# Altium PCB relay.PcbDoc
Units mil, origin at the board's own origin, x right, y up, seen from the top; angles counter-clockwise.
Board outline 2410 x 2235 mil, 2 copper layers (Top Layer, Bottom Layer); 40 components, 33 nets, 179 pads, 61 vias.
Unrouted connection lines stored in the file: 39.
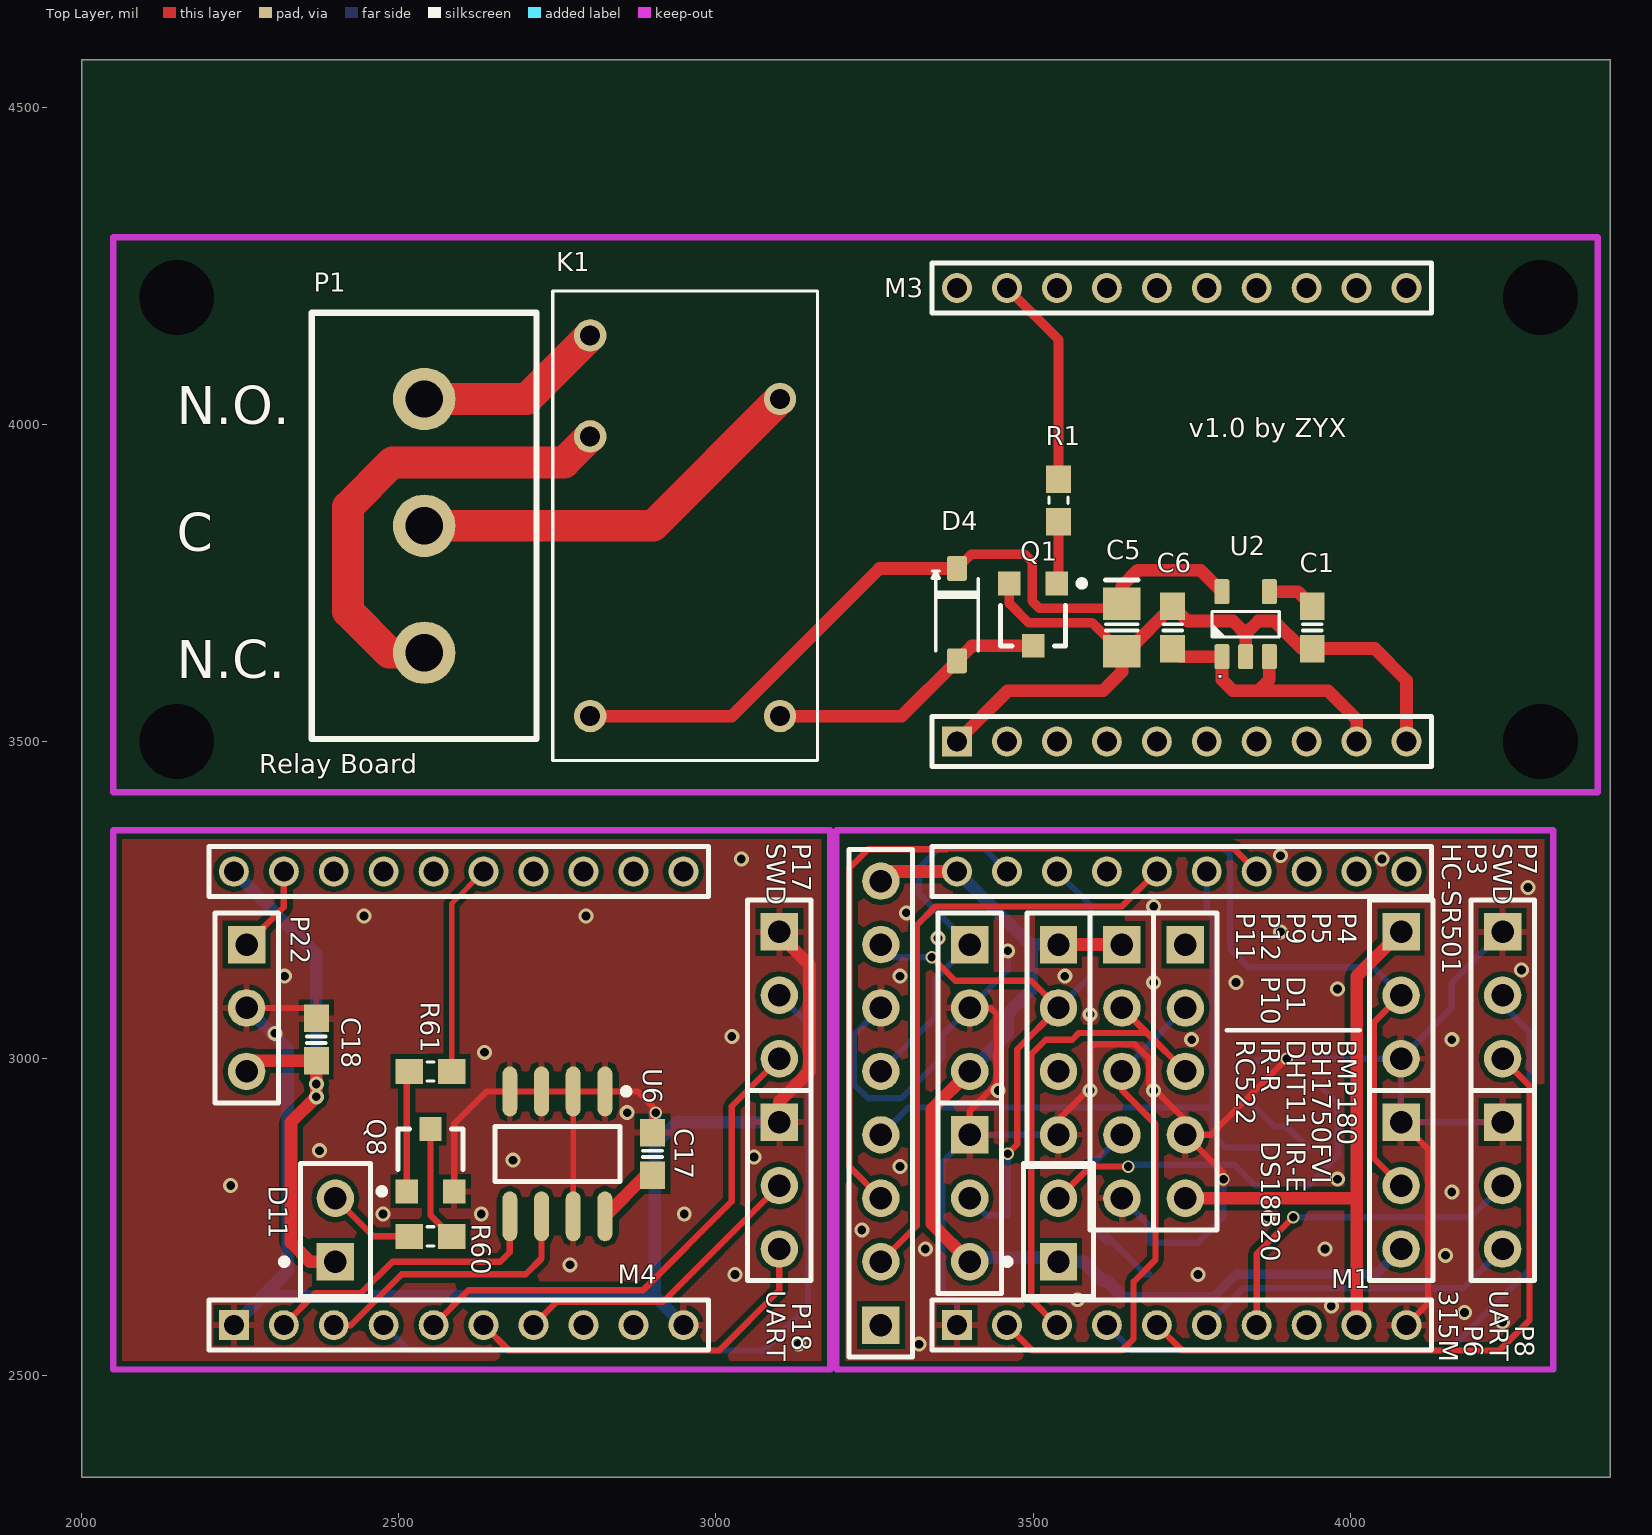
[diagram p0: Top Layer view]
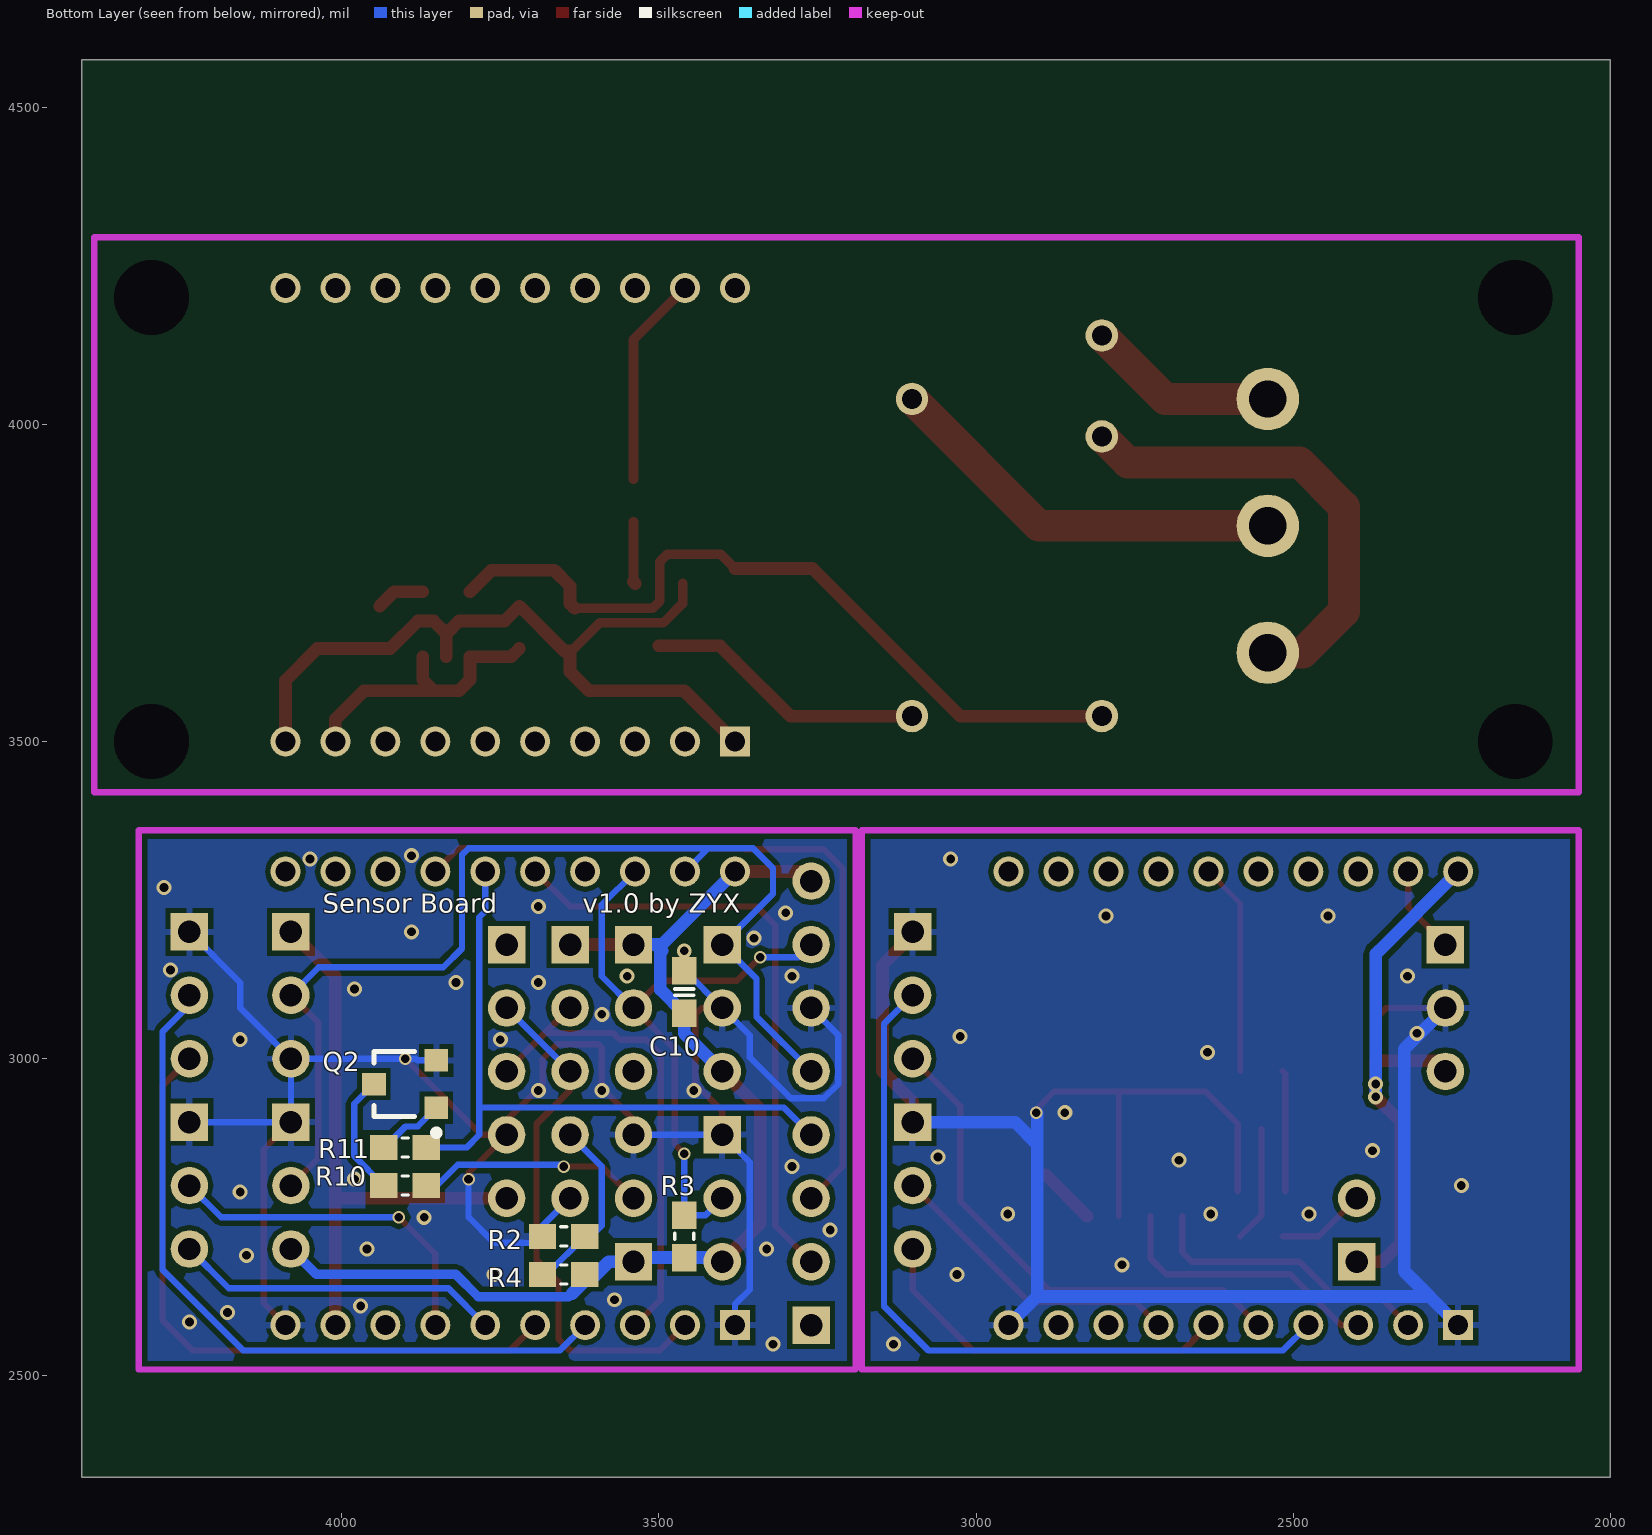
[diagram p1: Bottom Layer view, seen from below]

## Layer stack, top to bottom
Top Layer: signal copper 1.4
Dielectric: dielectric 12.6, FR-4, Dk 4.8
Bottom Layer: signal copper 1.4

## Board outline
2000,2340 4410,2340 4410,4575 2000,4575

## Design rules (kind name [scope] priority, off if disabled: settings)
Clearance [All] p1: gap=8
ComponentClearance [All] p1: gap=0 collisioncheckmode=3 verticalgap=0 showdistances=FALSE
HoleSize [All] p1: absolutevalues=TRUE maxlimit=196.85 minlimit=11.81 maxpercent=80.000 minpercent=20.000
MinimumSolderMaskSliver [All] p1: minsoldermaskwidth=0
PolygonConnect PolygonConnect_1 [IsVia vs IsPolygon] p1: connectstyle=Direct reliefconductorwidth=10 reliefentries=4 polygonreliefangle="90 Angle"
PolygonConnect [All] p2: connectstyle=Relief reliefconductorwidth=10 reliefentries=4 polygonreliefangle="90 Angle"
RoomDefinition IR [InComponentClass('IR')] p1: confinementstyle=ConfineIn formatcopy=TRUE lockcomponents=FALSE outline 2005,2470 3205,2470 3205,3385 2005,3385
RoomDefinition sensors [InComponentClass('sensors')] p2: confinementstyle=ConfineIn formatcopy=TRUE lockcomponents=FALSE outline 3165,2440 5570,2440 5570,3370 3165,3370
RoomDefinition relay [InComponentClass('relay')] p3: confinementstyle=ConfineIn formatcopy=TRUE lockcomponents=FALSE outline 0,0 4430,0 4430,4750 0,4750
RoutingVias [All] p1: holewidth=13.78 width=19.68 viastyle="Through Hole" minholewidth=13.78 minwidth=19.68 maxholewidth=39.37 maxwidth=59.06
SilkscreenOverComponentPads [All] p1: minsilkscreentomaskgap=0
SolderMaskExpansion [All] p1: expansion=4
Width [All] p1: maxlimit=50 minlimit=8 preferedwidth=10
24 further rules are at their usual default settings.

## Classes and differential pairs
component class IR: C17 C18 D11 M4 P17 P18 P22 Q8 R60 R61 U6
component class sensors: C10 D1 M1 P3 P4 P5 P6 P7 P8 P9 P10 P11 P12 Q2 R2 R3 R4 R10 R11
component class relay: C1 C5 C6 D4 K1 M3 P1 Q1 R1 U2

## Components (designator, comment, footprint, x,y, rotation, side; value= is the part's Value field where it differs from the comment)
C1 "Cap Semi" C-1608[0603] 3940,3680 r270 top
C5 "Cap Semi" C-2012[0805] 3640,3680 r270 top
C6 "Cap Semi" C-1608[0603] 3720,3680 r90 top
C10 "Cap Semi" C-1608[0603] 3460,3105 r270 bottom
C17 "Cap Semi" C-1608[0603] 2900,2850 r270 top
C18 "Cap Semi" C-1608[0603] 2370,3030 r270 top
D1 "IR-E" PIN2 3540,2680 r90 top
D4 "1N5819" SOD123 3380,3700 r270 top
D11 "IR-E" PIN2 2400,2680 r90 top
K1 "Relay-S" Relay-JZC-32F-ZS 3160,3470 r90 top
M1 "MCU_IF_V1" MCU_IF_V1 3380,2580 r0 top
M3 "MCU_IF_V1" MCU_IF_V1 3380,3500 r0 top
M4 "MCU_IF_V1" MCU_IF_V1 2240,2580 r0 top
P1 "OUT" Edge5.08mm3P 2540,3640 r270 top
P3 "HC-SR501" HDR1X3 4080,3200 r270 top
P4 "BMP180" HDR1X5 3740,3180 r270 top
P5 "BH1750FVI" HDR1X5 3640,3180 r270 top
P6 "315M" HDR1X3 4080,2900 r270 top
P7 "SWD" HDR1X3 4240,3200 r270 top
P8 "UART" HDR1X3 4240,2900 r270 top
P9 "DHT11" HDR1X4 3540,3180 r270 top
P10 "DS18B20" HDR1X3 3400,2880 r270 top
P11 "RC522" HDR1X8 3260,2580 r90 top
P12 "IR-R" HDR1X3 3400,3180 r270 top
P17 "SWD" HDR1X3 3100,3200 r270 top
P18 "UART" HDR1X3 3100,2900 r270 top
P22 "IR-R" HDR1X3 2260,3180 r270 top
Q1 "S8050" SOT23B 3500,3700 r180 top
Q2 "S8050" SOT23B 3900,2960 r90 bottom
Q8 "S8050" SOT23B 2550,2840 r0 top
R1 "Res Semi" R-1608[0603] 3540,3880 r90 top
R2 "Res Semi" R-1608[0603] 3650,2720 r0 bottom
R3 "Res Semi" R-1608[0603] 3460,2720 r90 bottom
R4 "Res Semi" R-1608[0603] 3650,2660 r0 bottom
R10 "Res Semi" R-1608[0603] 3900,2800 r0 bottom
R11 "Res Semi" R-1608[0603] 3900,2860 r180 bottom
R60 "Res Semi" R-1608[0603] 2550,2720 r0 top
R61 "Res Semi" R-1608[0603] 2550,2980 r0 top
U2 "MIC5219-3.3" SOT23-5 3835,3685 r90 top
U6 "M24C64MN1" SOP8_N 2750,2850 r270 top

## Footprints (in the part's own frame and the unit in brackets; to place one, negate y for a bottom-side part, rotate by r counter-clockwise, add the part's x,y. Pads: shape width x height; smd on the part's side, far side on the other; paste and mask are expansions set on the pad)
C-1608[0603] [mm] "Chip Capacitor; Body 1.6 x 0.8 mm (LxW typ)"
  rect 1.1x1 smd: 1(-0.85,0) 2(0.85,0)
  silkscreen extent -0.13,-0.38 0.13,0.38, body extent -0.8,-0.42 0.8,0.38, height 0.29
C-2012[0805] [mm] "Chip Capacitor; Body 2.0 x 1.2 mm (LxW typ)"
  rect 1.3x1.5 smd: 1(-0.95,0) 2(0.95,0)
  silkscreen extent -1.9,-0.65 0.13,0.65, body extent -1,-0.64 1,0.62, height 0.78
Edge5.08mm3P [mm] "绿色接线端子5.0"
  round 2.5 hole 1.5: 1(-10.16,0) 2(-5.08,0) 3(0,0)
  silkscreen extent -13.61,-4.5 3.45,4.5
HDR1X3 [mm] "Connector; Header; 3 Position"
  rect 1.5x1.5 hole 0.9: 1(0,0)
  round 1.5 hole 0.9: 2(2.54,0) 3(5.08,0)
  silkscreen extent -1.27,-1.27 6.35,1.27
HDR1X4 [mm] "Connector; Header; 4 Position"
  rect 1.5x1.5 hole 0.9: 1(0,0)
  round 1.5 hole 0.9: 2(2.54,0) 3(5.08,0) 4(7.62,0)
  silkscreen extent -1.27,-1.27 8.89,1.27
HDR1X5 [mm] "Connector; Header; 5 Position"
  rect 1.5x1.5 hole 0.9: 1(0,0)
  round 1.5 hole 0.9: 2(2.54,0) 3(5.08,0) 4(7.62,0) 5(10.16,0)
  silkscreen extent -1.27,-1.27 11.43,1.27
HDR1X8 [mm] "Connector; Header; 8 Position"
  rect 1.5x1.5 hole 0.9: 1(0,0)
  round 1.5 hole 0.9: 2(2.54,0) 3(5.08,0) 4(7.62,0) 5(10.16,0) 6(12.7,0) 7(15.24,0) 8(17.78,0)
  silkscreen extent -1.27,-1.27 19.05,1.27
MCU_IF_V1 [mm]
  rect 1.2x1.2 hole 0.8: 1(0,0)
  round 1.2 hole 0.8: 2(2,0) 3(4,0) 4(6,0) 5(8,0) 6(10,0) 7(12,0) 8(14,0) 9(16,0) 10(18,0) 11(18,18.161) 12(16,18.161) 13(14,18.161) 14(12,18.161) 15(10,18.161) 16(8,18.161) 17(6,18.161) 18(4,18.161) 19(2,18.161) 20(0,18.161)
  silkscreen extent -1,-1 19,19.16, body extent -0.97,-1 18.97,19.16, height 6
PIN2 [mm] "Photosensitive Diode; 2 Leads"
  rect 1.5x1.5 hole 0.9: 1(0,0)
  round 1.5 hole 0.9: 2(2.54,0)
  silkscreen extent -1.4,-1.4 3.94,2.17
R-1608[0603] [mm] "Chip Resistor; Body 1.6 x 0.8 mm (LxW typ)"
  rect 1.1x1 smd: 1(-0.85,0) 2(0.85,0)
  silkscreen extent -0.13,-0.38 0.13,0.38, body extent -1.27,-0.51 1.33,0.49, height 0.48
Relay-JZC-32F-ZS [mm]
  round 1.3 hole 0.8: 1(14.48,1.5) 2(12.98,9.1) 3(17.02,9.1) 4(1.78,1.5) 5(1.78,9.1)
  silkscreen extent 0,0 18.8,10.6
SOD123 [mm] "SOD-123; 2 Leads; Body 2.7 x 1.6 mm, (LxW)"
  round 0.508 on Mech15: 0(0,0)
  rrect25% 1x0.8 smd: 1(1.85,0) 2(-1.85,0)
  silkscreen extent -1.75,-1 1.45,0.85, body extent -1.95,-0.9 1.95,0.9, height 1.18
SOP8_N [mm] "SOIC, 8-Leads, Body 4.9x3.9mm, Pitch 1.27mm, IPC Medium Density"
  oval 2x0.6 smd: 1(-2.5,1.905) 2(-2.5,0.635) 3(-2.5,-0.635) 4(-2.5,-1.905) 5(2.5,-1.905) 6(2.5,-0.635) 7(2.5,0.635) 8(2.5,1.905)
  silkscreen extent -2.62,-2.5 1.1,2.88, body extent -2,-2.5 2,2.5, height 1.75
SOT23-5 [mm]
  round 0.5 on Mech15: 0(0,0)
  rrect25% 1x0.6 smd: 1(-1.3,0.95) 2(-1.3,0) 3(-1.3,-0.95) 4(1.3,-0.95) 5(1.3,0.95)
  silkscreen extent -0.51,-1.35 0.51,1.35, body extent -1.4,-1.45 1.4,1.45, height 1.44
SOT23B [mm] "SOT-23; 3 Leads; Body 3.0 x 2.6 mm, inc. leads (LxW max)"
  rect 0.9x0.95 smd: 1(-0.95,-1.25) 2(0.95,-1.25) 3(0,1.25)
  silkscreen extent -2.08,-1.37 1.3,1.25, body extent -1.52,-1.27 1.48,1.27, height 1.1

## Part data
C1 C5 C6 C10 C17 C18: "Capacitor (Semiconductor SIM Model)"
D1 D11: library part LED0, "Typical INFRARED GaAs LED"
D4: library part "D Schottky", "Schottky Diode"
K1: library part Relay-SPDT, "Single-Pole Dual-Throw Relay"
P1 P7 P8 P17 P18: library part "Header 3", "Header, 3-Pin"
P3 P6 P10: "Header, 3-Pin"
P4: "Header, 5-Pin"
P9: "Header, 4-Pin"
P11: "Header, 8-Pin"
P12 P22: library part IR, "Header, 3-Pin"
Q1 Q2 Q8: library part 2N3904, "NPN General Purpose Amplifier"
R1 R2 R3 R4 R10 R11 R60 R61: "Semiconductor Resistor"
U2: library part MIC5219, "500mA-Peak Output LDO Regulator"
U6: "64 Kbit Serial I睠 Bus EEPROM"

## Free pads (board coordinates)
  round 0 hole 118.11: 0(2150,4200) 1(4300,4200) 2(4300,3500) 3(2150,3500)

## Via types
v1: diameter 23.62, hole 13.78, Top Layer to Bottom Layer, 54 vias
v2: diameter 19.68, hole 13.78, Top Layer to Bottom Layer, 7 vias

## Nets (pads, with @x,y where several pads share a name; then routed paths per layer and width w, separated by ;. In a path a pad name is that pad's centre, name@x,y a point inside that pad or via, vN(x,y) a via of type N, cw(c..) or ccw(c..) an arc to the next point about the centre after c; other vN are vias at no path point)
ADD: P5.4 R2.1 R4.2 | length 303.5
  Bottom Layer w10: R2.1@3616.54,2710 3590,2736.54 3590,2743.46 3590,2830 P5.4 ; R2.1 3676.54,2660 R4.2 R4.2@3673.46,2660
GND: C1.2 C5.2 C6.2 C10.1 C17.1 C18.1 M1.1 M1.10 M3.1 M3.10 M4.1 M4.10 P3.3 P4.4 P5.5 P6.1 P7.1 P8.1 P9.4 P10.1 P11.6 P12.2 P17.1 P18.1 P22.2 Q1.2 Q2.2 Q8.2 R2.2 U2.2 U6.1 U6.2 U6.3 U6.4 U6.7 | length 7523.9
  Top Layer w8: U6.7 U6.2
  Top Layer w10: P22.2 2353.46,3080 C18.1 ; Q8.2 2587.4,2897.4 2638.43,2948.43 U6.4 2876.57,2948.43 2900,2925 C17.1 ; P10.1 3400,2917.47 3442,2959.47 3442,2961.86 3442.53,2962.38 3442.53,2997.62 3442,2998.14 3442,3007.46 3442.53,3007.98 3442.53,3070 3432.53,3080 P12.2 ; P9.4 3540,2904 3590,2954 3590,3017 3595.53,3022.53 3660.47,3022.53 3683,3000 3683,2960 3763,2880 P4.4 ; v2@3800,2802.84 3800,2820 P4.4 ; v2(3900,3000) 3780,2880 P4.4 ; P6.1 4123,2857 4123,2614.34 M1.10
  Top Layer w15: Q1.2 3462.6,3717.4 3493,3687 3593.36,3687 3637.76,3642.6 C5.2
  Top Layer w20: P18.1 3100,2932.79 3147.53,2980.31 3147.53,3147.53 3100,3195.06 P17.1 ; M3.1 3460,3580 3610,3580 3640,3610 C5.2 3649.13,3642.6 C6.2 3743.46,3690 3815,3690 3835,3670 ; U2.2 3835,3670 ; M3.10 4088.66,3596.34 4038.46,3646.54 C1.2 3923.46,3646.54 3880,3690 3855,3690 3835,3670
  Bottom Layer w10: P11.6 3217.47,3037.47 3217.47,2960 3240,2937.47 3292.02,2937.47 3357,3002.46 3357,3037 P12.2 3458.46,3138.46 C10.1 v1(3460,3170) ; M1.1 3380,2613 3357,2636 3357,2837 P10.1 P9.4 ; P5.5 3683.46,2736.54 3683.46,2710 3760,2710 3800,2750 v2(3800,2810) ; Q2.2 3880.4,2997.4 3883,3000 P3.3 ; P8.1 P6.1 P3.3 ; P7.1 4160,3120 4160,3080 P3.3
  Bottom Layer w20: M4.1 2325,2665 2325,3015 P22.2 ; 2292.02,2625 2903.66,2625 ; 2903.66,2865 2938.66,2900 P18.1 ; v2(2905,2915) 2903.66,2913.66 2903.66,2625 ; M4.10 2903.66,2625
  other v1: 3130,2550 3320,2550 4240,2585 4180,2600 3970,2610 3570,2620 3030,2660 3760,2660 2770,2675 4150,2690 3330,2700 3960,2700 3230,2730 3870,2750 2475,2755 2630,2755 2950,2755 4160,2790 2235,2800 3980,2810 3290,2830 2680,2840 3060,2845 2375,2855 2860,2915 3445,2950 3590,2950 3690,2950 2635,3010 3750,3030 4160,3030 3025,3035 2305,3040 3590,3070 3980,3110 3690,3120 3820,3120 2320,3130 3290,3130 3550,3130 4270,3140 3350,3190 3890,3200 2445,3225 2795,3225 3300,3230 3690,3240 4280,3270 3040,3315 4050,3315 3890,3320
NetC1_1: C1.1 U2.4 | length 77
  Top Layer w20: U2.4 3917.28,3736.18 C1.1
NetD1_2: D1.2 R10.1 | length 362
  Top Layer w10: D1.2 3590,2830 v2(3650,2830)
  Bottom Layer w10: v2(3650,2830) 3652.84,2832.84 3817.16,2832.84 3850,2800 R10.1
NetD4_1: D4.1 K1.4 Q1.3 | length 445
  Top Layer w20: K1.4 3100.94,3540 3292.83,3540 D4.1 3403.62,3650.79 Q1.3
NetD11_2: D11.2 R60.1 | length 141.4
  Top Layer w10: D11.2 2460,2720 R60.1
NetQ1_2: Q1.1 R1.1 | length 98.4
  Top Layer w15: Q1.1@3540,3751.81 R1.1
  Top Layer w20: Q1.1 Q1.1@3540,3751.81
NetQ2_2: Q2.1 R11.1 | length 108.7
  Bottom Layer w10: Q2.1 3880,2893.39 3880,2893.23 3899.47,2893.23 3932.7,2860 R11.1
NetQ2_3: Q2.3 R10.2 | length 192
  Bottom Layer w10: R10.2 3980,2846.54 3980,2929.21 Q2.3
NetQ8_2: Q8.1 R61.1 | length 190.8
  Top Layer w10: Q8.1 2512.6,2976.06 R61.1
NetQ8_3: Q8.3 R60.2 | length 183.1
  Top Layer w10: Q8.3 2550,2753.46 R60.2
OUT_A: K1.2 P1.3 | length 739.6
  Top Layer w50: P1.3 2485,3640 2420,3705 2420,3870 2490,3940 2760.71,3940 K1.2
OUT_B: K1.1 P1.2 | length 643.8
  Top Layer w50: P1.2 2900.87,3840 K1.1
OUT_C: K1.3 P1.1 | length 303.2
  Top Layer w50: P1.1 2701.65,4040 K1.3
PA0: M1.19 M3.19 M4.19 P3.2 P6.2 P11.5 P12.1 P22.1 R1.2 | length 2228.6
  Top Layer w10: P22.1 2318.74,3238.74 M4.19 ; P6.2 4037,2843 4037,3057 P3.2
  Top Layer w15: M3.19 3540,4133.74 R1.2
  Bottom Layer w10: P11.5 3346,3066 3346,3126 P12.1 3320,3260 3320,3300 3351.62,3331.62 3422.12,3331.62 ; M1.19 3422.12,3331.62 ; P3.2 4036,3144 3840,3144 3810.32,3173.68 3810.32,3321.3 3800,3331.62 3422.12,3331.62
PA1: M1.18 M3.18 M4.18 P9.2 P10.2 P11.7 R3.2 | length 1009.6
  Top Layer w10: v2(3340,3160) 3377,3123 3497,3123 P9.2 3475,3015 3475,2865 v2(3460,2850)
  Bottom Layer w10: P11.7 3280,3160 v2(3340,3160) ; P10.2 3426.54,2753.46 R3.2 v2(3460,2850) ; M1.18 3590,3242.48 3590,3130 P9.2
PA4: M1.17 M3.17 M4.17
PA5: M1.16 M3.16 M4.16 P11.2 | length 967.4
  Top Layer w10: P11.2 3316.47,2736.47 3316.47,3210.47 3346,3240 3639.96,3240 M1.16
PA6: M1.15 M3.15 M4.15 P11.4 R11.2 R61.2 | length 1387.3
  Top Layer w8: R61.2 2583.46,3244.76 M4.15
  Bottom Layer w10: P11.4 3303,2923 3783,2923 ; M1.15 3773.7,3232.3 3783,3223 3783,2923 ; R11.2 3803,2860 3783,2880 3783,2923
PA7: M1.14 M3.14 M4.14 P11.3 | length 1211.4
  Top Layer w10: P11.3 3210,2830 3210,3300 3240,3330 3363.21,3330 3364.83,3331.62 3815.82,3331.62 M1.14
PA9: M1.7 M3.7 M4.7 P8.2 P18.2 | length 1023.2
  Top Layer w10: M4.7 2749.06,2616.62 2916.62,2616.62 P18.2 ; M1.7 3852.44,2692.44 v2(3910,2750)
  Bottom Layer w10: v2(3910,2750) 4190,2750 P8.2
PA10: M1.6 M3.6 M4.6 P8.3 P18.3 | length 1103.2
  Top Layer w10: M4.6 2673.7,2540 3005,2540 3100,2635 P18.3
  Bottom Layer w10: M1.6 3831.7,2638 4178,2638 P8.3
PA13: M1.5 M3.5 M4.5 P7.3 P17.3 | length 1860.8
  Top Layer w10: M4.5 2609.96,2635 2885,2635 3025,2775 3025,2925 P17.3 ; M1.5 3734.96,2540 4235,2540 4282.53,2587.53 4282.53,2957.47 P7.3
PA14: M1.4 M3.4 M4.4 P7.2 P17.2 | length 2408.8
  Bottom Layer w10: M4.4 2516.22,2540 3075,2540 3145,2610 3145,3055 P17.2 ; M1.4 3656.22,2540 4155.09,2540 4282.53,2667.44 4282.53,3042.53 4240,3085.06 P7.2
PB6: M1.3 M3.3 M4.3 P4.3 P5.2 U6.6 | length 1219.1
  Top Layer w10: M4.3 2424.43,2580 2504.43,2660 2700,2660 2725,2685 U6.6 ; M1.3 3497,2620.48 3497,3007 3520,3030 3561.47,3030 3572,3040.53 3679.47,3040.53 ; P5.2 3679.47,3040.53 ; P4.3 3679.47,3040.53
PB7: M1.2 M3.2 M4.2 P4.2 P5.3 U6.5 | length 1283.5
  Top Layer w10: M4.2 2368.74,2630 2440,2630 2490,2680 2660,2680 2675,2695 U6.5 ; M1.2 3498.74,2540 3640,2540 3658.34,2558.34 3658.34,2648.34 3692.84,2682.84 3692.84,2897.16 3640,2950 P5.3
  Bottom Layer w10: P5.3 P4.2
PB10: M1.13 M3.13 M4.13
PB11: M1.12 M3.12 M4.12
V_RELAY: C5.1 D4.2 K1.5 U2.5 | length 1228
  Top Layer w15: D4.2 3402.17,3795 3487,3795 3498.31,3783.68 3498.31,3721.69 3510,3710 C5.1@3632.6,3710
  Top Layer w20: K1.5 3025.08,3540.08 3257.83,3772.83 D4.2 ; C5.1@3632.6,3710 C5.1 3640,3745 3665,3770 3763.78,3770 U2.5
VBAT: M1.11 M3.11 M4.11
VCC: C10.2 C17.2 C18.2 D1.1 D11.1 M1.20 M3.20 M4.20 P5.1 P6.3 P9.1 P10.3 P11.8 P12.3 P22.3 R3.1 R4.1 U6.8 | length 2804.4
  Top Layer w20: P22.3 2276.54,2996.54 C18.2 v1(2370,2940) 2330,2900 2330,2710 2360,2680 D11.1 ; U6.8 2889.96,2816.54 C17.2 ; P11.8 3260,3295 M1.20 ; P10.3 3340,2740 3340,2920 P12.3 ; P9.1 P5.1
  Bottom Layer w15: 3636.54,2630 3641.72,2624.81 3784.81,2624.81 3820,2660 4040,2660 P6.3
  Bottom Layer w20: M4.20 2365,3170 2370,3165 v1(2370,2940) ; M1.20 3495,3180 ; P10.3 3400,2686.54 R3.1 3533.46,2686.54 D1.1 3579,2680 3609,2650 3616.54,2650 3636.54,2630 ; P12.3 3460,3040 C10.2 3497.69,3109.22 3497.69,3177.31 3495,3180 ; 3495,3170 3505,3180 ; P9.1 3505,3180 ; 3495,3180 3505,3180
  other v1: 2370,2960
VDD: C6.1 M1.9 M3.9 M4.9 P3.1 P4.5 U2.1 U2.3 | length 1486.8
  Top Layer w20: C6.1 3732.72,3633.82 U2.1 3797.6,3597.4 3815,3580 3855,3580 ; P4.5 3740.16,2779.84 4009.76,2779.84 4009.92,2780 ; U2.3 3872.4,3597.4 3855,3580 ; M1.9 4009.92,3129.92 P3.1 ; M3.9 4009.92,3535.08 3965,3580 ; 3855,3580 3965,3580 ; 3855,3580 3965,3580
  Bottom Layer w20: P4.5@3737,2777 P4.5
VUSB: M1.8 M3.8 M4.8
pads on no net: D4.0 P4.1 P9.3 P11.1 U2.0

## Polygon pours and split planes (outlines as drawn)
GND on Bottom Layer "Bottom Layer-No Net" (solid, remove dead copper): 2050,3360 2050,2510 3180,2510 3180,3360
GND on Bottom Layer "Bottom Layer-No Net" (solid, remove dead copper, pour order 1000): 3190,3360 3190,2510 4320,2510 4320,3360
GND on Top Layer "Bottom Layer-No Net" (solid, remove dead copper): 2050,3360 2050,2510 3180,2510 3180,3360
GND on Top Layer "Bottom Layer-No Net" (solid, remove dead copper, pour order 1001): 3190,3360 3190,2510 4320,2510 4320,3360

## Keep-outs
Keep-Out Layer:
  lines w10: 2050,2510 2050,3360 3180,3360 3180,2510 2050,2510 ; 2050,3420 2050,4295 4390,4295 4390,3420 2050,3420 ; 3190,2510 3190,3360 4320,3360 4320,2510 3190,2510

## Silkscreen, mask and mechanical layers (free items; w line width, h text height)
Top Overlay:
  lines w7: 3805,3045 4015,3045
  text "N.O." at 2150,4000 h60
  text "v1.0 by ZYX" at 3745,3980 h30
  text "C" at 2150,3800 h60
  text "N.C." at 2150,3600 h60
  text "Relay Board" at 2280,3450 h30
  text "SWD" at 3080,3340 h30 r270
  text "UART" at 3080,2635 h30 r270
Bottom Overlay:
  text "v1.0 by ZYX" at 3620,3230 h30
  text "Sensor Board" at 4030,3230 h30